# Allegro board PMOD2BNCSIMPLE_v1_05.brd
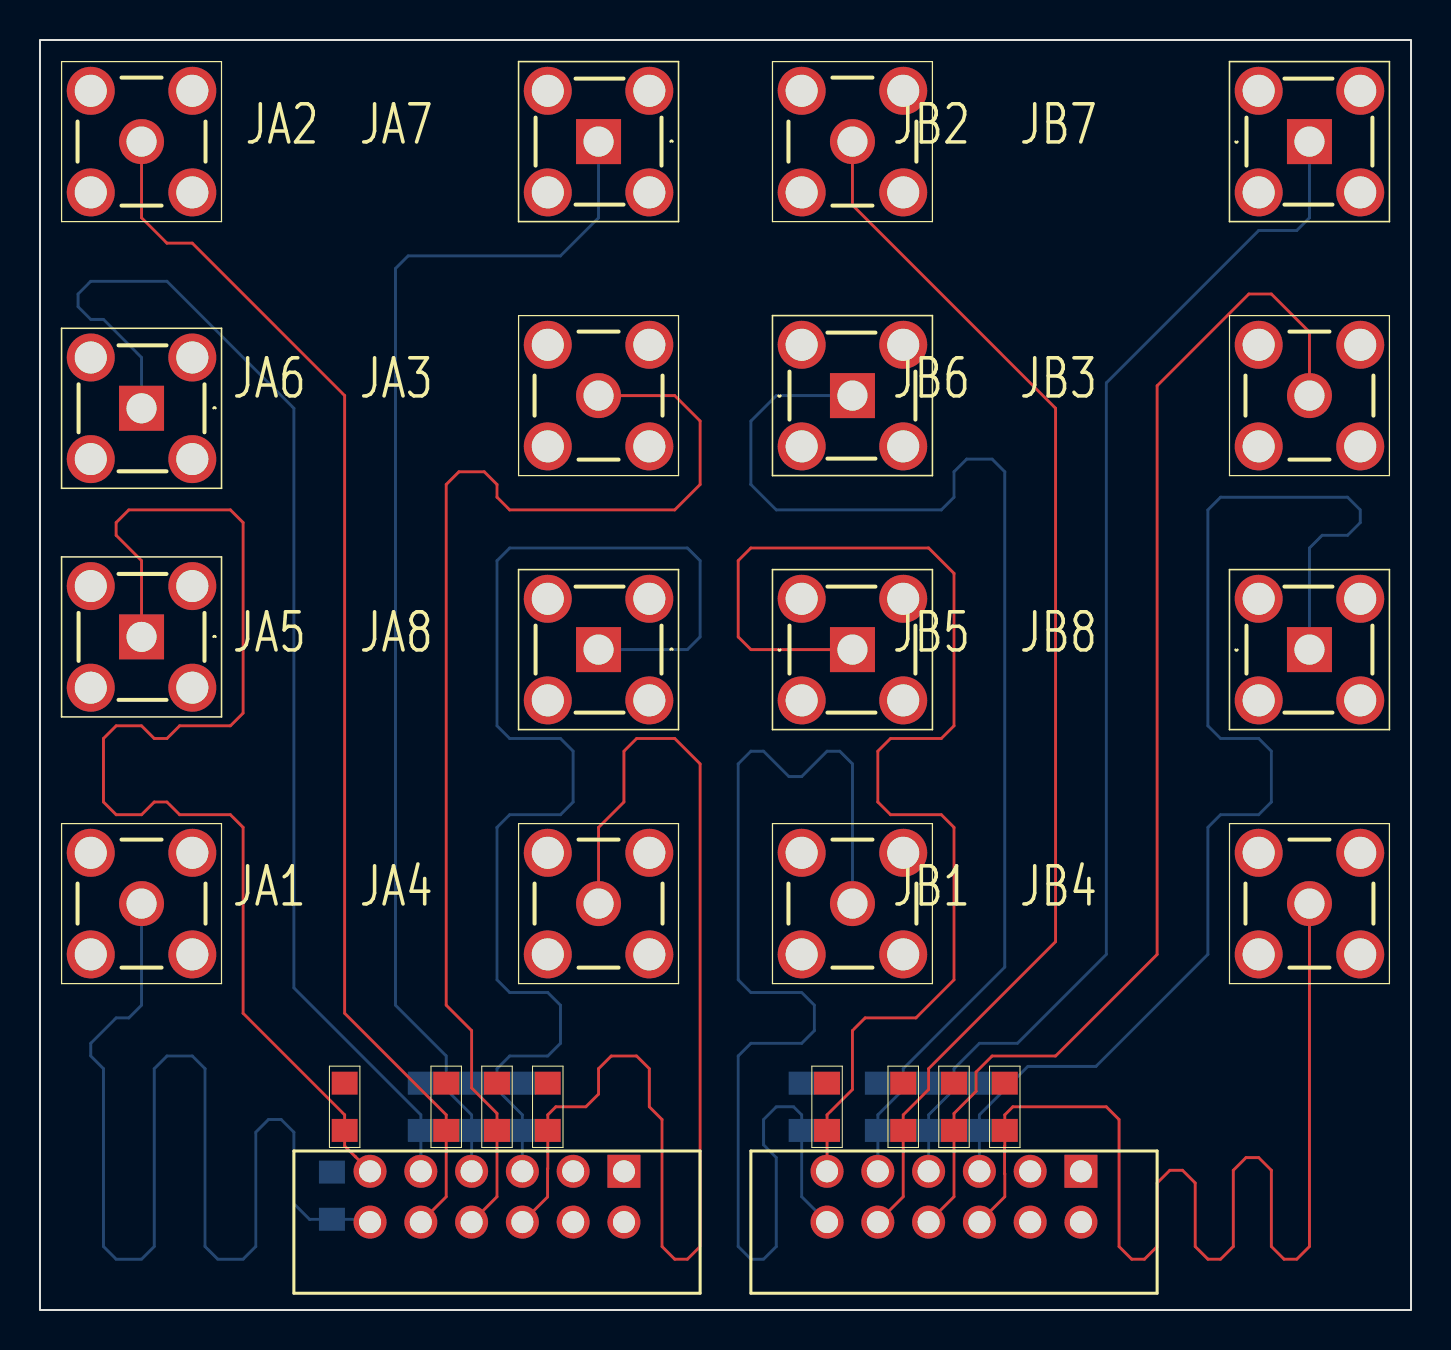
[diagram p0: board, top side]
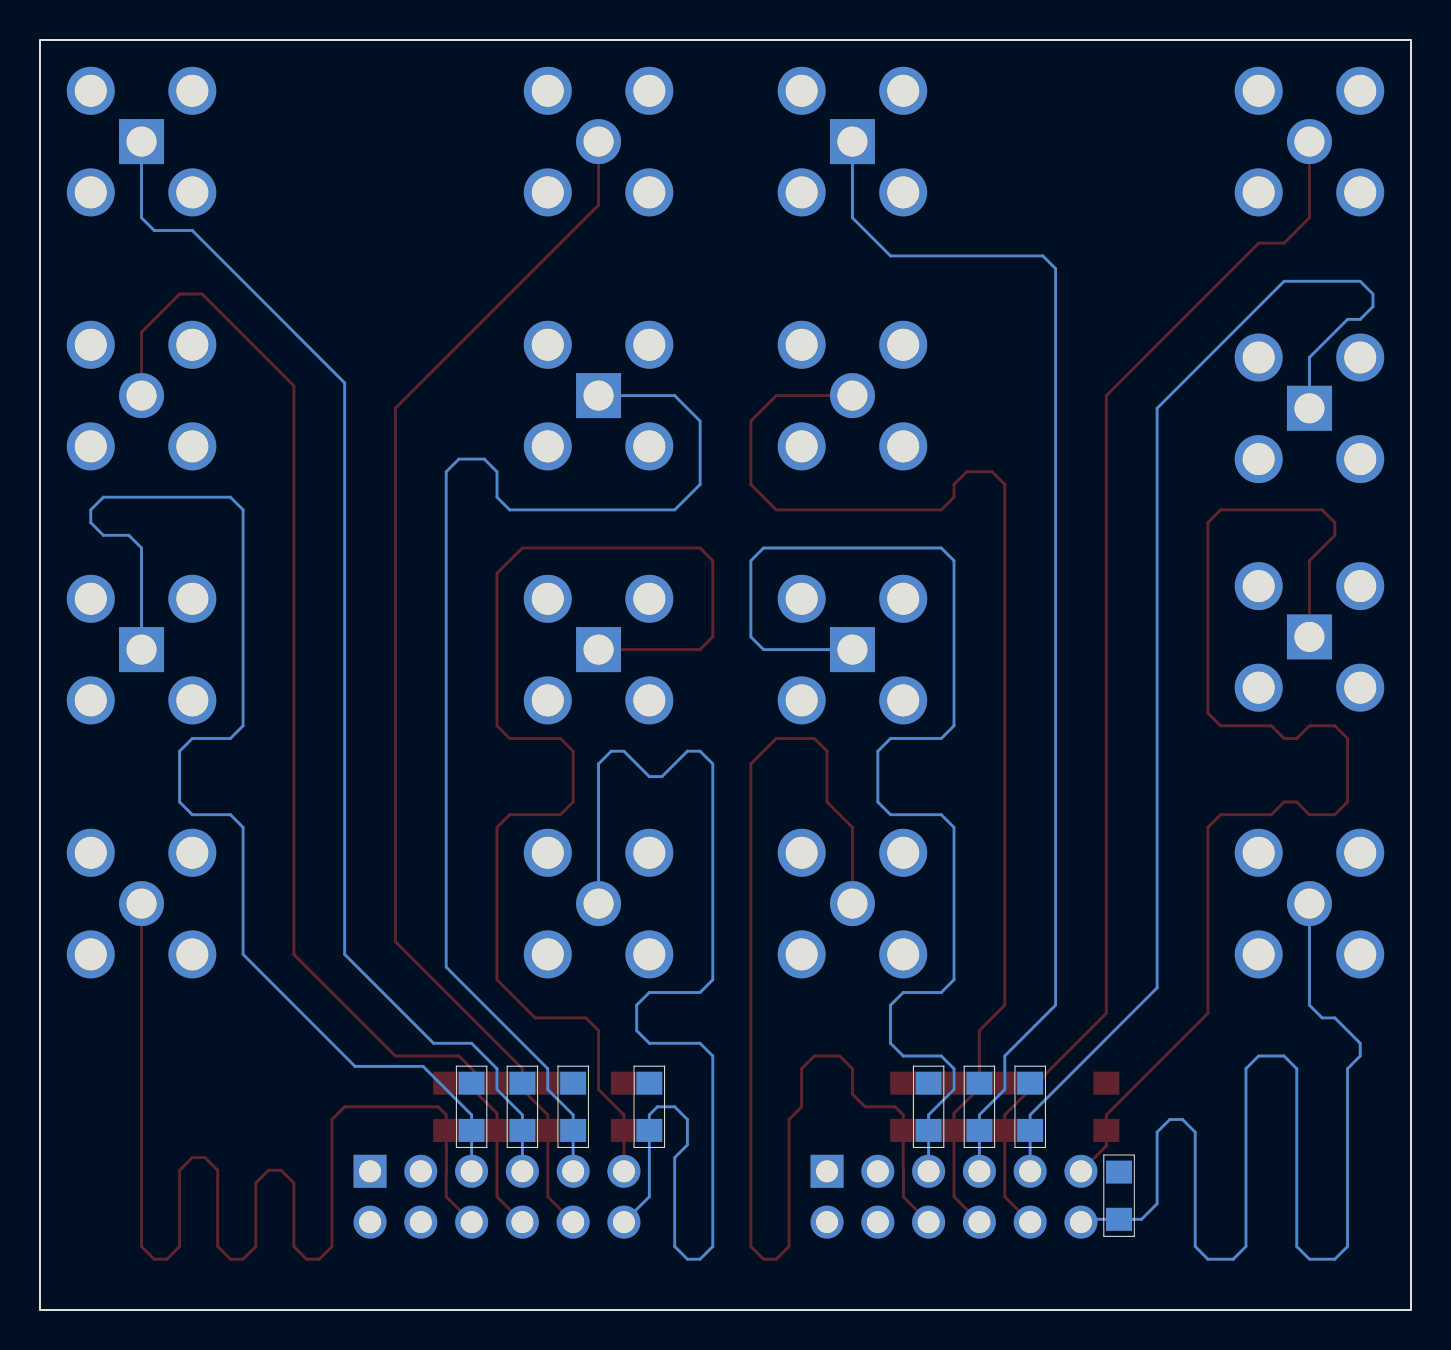
[diagram p1: board, bottom side, seen from below]

Outline 68.58 x 63.5 mm; copper layers: TOP, GND1, GND2, BOTTOM. Coordinates in mm from the lower left corner of the outline.
Outline path: rectangle 0,0 68.58,63.5

## Design rules (mm)
constraint set DEFAULT: min track width 0.145

## Placement (name value [footprint] x y rotation side)
J1  71764_0114  [717640112]  12.7 0.84 180 top
J2  71764_0114  [717640112]  35.56 0.84 180 top
R1  -  [RES_0805]  24.13 10.16 90 bottom
R2  -  [RES_0805]  21.59 10.16 90 bottom
R3  -  [RES_0805]  19.05 10.16 90 bottom
R4  -  [RES_0805]  15.24 10.16 90 top
R5  -  [RES_0805]  14.61 5.71 90 bottom
R6  -  [RES_0805]  20.32 10.16 90 top
R7  -  [RES_0805]  22.86 10.16 90 top
R8  -  [RES_0805]  25.4 10.16 90 top
R9  -  [RES_0805]  46.99 10.16 90 bottom
R10  -  [RES_0805]  44.45 10.16 90 bottom
R11  -  [RES_0805]  41.91 10.16 90 bottom
R12  -  [RES_0805]  39.37 10.16 90 top
R13  -  [RES_0805]  38.1 10.16 90 bottom
R14  -  [RES_0805]  43.18 10.16 90 top
R15  -  [RES_0805]  45.72 10.16 90 top
R16  -  [RES_0805]  48.26 10.16 90 top
U1  -  [SMA-R-RA]  5.08 33.66 180 top
U2  -  [SMAFST_PCBN]  5.08 20.32 0 top
U3  -  [SMA-R-RA]  5.08 45.09 180 top
U4  -  [SMAFST_PCBN]  5.08 58.42 0 top
U5  -  [SMA-R-RA]  27.94 58.42 180 top
U6  -  [SMAFST_PCBN]  27.94 45.72 0 top
U7  -  [SMA-R-RA]  27.94 33.02 180 top
U8  -  [SMAFST_PCBN]  27.94 20.32 0 top
U9  -  [SMA-R-RA]  40.64 33.02 0 top
U10  -  [SMAFST_PCBN]  40.64 20.32 0 top
U11  -  [SMA-R-RA]  40.64 45.72 0 top
U12  -  [SMAFST_PCBN]  40.64 58.42 0 top
U13  -  [SMA-R-RA]  63.5 58.42 0 top
U14  -  [SMAFST_PCBN]  63.5 45.72 0 top
U15  -  [SMA-R-RA]  63.5 33.02 0 top
U16  -  [SMAFST_PCBN]  63.5 20.32 0 top

## Library data of the parts
J1 J2 = 71764_0114
R1-R3 R5-R16 = RES_0805
R4 = RES_0805: signal model: resistorPack_850
U1 U3 U5 U7 U9 U11 U13 U15 = SMA-R-RA
U2 U4 U6 U8 U10 U12 U14 U16 = SMAFST_PCBN

## Footprints (pads in the part's own frame, mm; a bottom-side part is the same pattern mirrored in y, then rotated)
717640112
  rect 1.651x1.651 hole 1.1: 1(-16.51,-6.096)
  round 1.651 hole 1.1: 2(-16.51,-3.556) 3(-13.97,-6.096) 4(-13.97,-3.556) 5(-11.43,-6.096) 6(-11.43,-3.556) 7(-8.89,-6.096) 8(-8.89,-3.556) 9(-6.35,-6.096) 10(-6.35,-3.556) 11(-3.81,-6.096) 12(-3.81,-3.556)
RES_0805
  rect 1.151x1.3 smd: 1(1.181,0) 2(-1.181,0)
SMA-R-RA
  rect 2.25x2.25 hole 1.501: 1(0,0)
  round 2.4 hole 1.6: 2(-2.54,2.54) 3(-2.54,-2.54) 4(2.54,-2.54) 5(2.54,2.54)
SMAFST_PCBN
  round 2.25 hole 1.501: 1(0,0)
  round 2.4 hole 1.6: 2(-2.54,-2.54) 3(2.54,-2.54) 4(2.54,2.54) 5(-2.54,2.54)

## Nets
GND: J1.3 J1.4 J2.3 J2.4 R1.1 R2.1 R3.1 R4.1 R5.1 R6.1 R7.1 R8.1 R9.1 R10.1 R11.1 R12.1 R13.1 R14.1 R15.1 R16.1 U1.2 U1.3 U1.4 U1.5 U2.2 U2.3 U2.4 U2.5 U3.2 U3.3 U3.4 U3.5 U4.2 U4.3 U4.4 U4.5 U5.2 U5.3 U5.4 U5.5 U6.2 U6.3 U6.4 U6.5 U7.2 U7.3 U7.4 U7.5 U8.2 U8.3 U8.4 U8.5 U9.2 U9.3 U9.4 U9.5 U10.2 U10.3 U10.4 U10.5 U11.2 U11.3 U11.4 U11.5 U12.2 U12.3 U12.4 U12.5 U13.2 U13.3 U13.4 U13.5 U14.2 U14.3 U14.4 U14.5 U15.2 U15.3 U15.4 U15.5 U16.2 U16.3 U16.4 U16.5
N17882: J1.11 R4.2 U1.1
N17894: J1.9 R3.2 U3.1
N17906: J1.7 R2.2 U5.1
N17918: J1.5 R1.2 U7.1
N17930: J1.12 R5.2 U2.1
N17948: J1.10 R6.2 U4.1
N17973: J1.8 R7.2 U6.1
N17998: J1.6 R8.2 U8.1
N19655: J2.11 R12.2 U9.1
N19661: J2.9 R11.2 U11.1
N19667: J2.7 R10.2 U13.1
N19673: J2.5 R9.2 U15.1
N19679: J2.12 R13.2 U10.1
N19687: J2.10 R14.2 U12.1
N19697: J2.8 R15.2 U14.1
N19707: J2.6 R16.2 U16.1

Pads without a net: J1 1 2; J2 1 2

## Routing (per net, layer and track width the routed paths; a pad name or vN(x,y) marks a point on that pad's centre or on a via; arc(x,y) is an arc through that point)
N17882: length 61.7
  TOP w0.145: J1.11 15.78,7.66 15.78,7.66 15.24,8.2 R4.2 15.24,9.76 10.16,14.84 10.16,24.13 9.53,24.77 6.99,24.77 6.35,25.4 5.71,25.4 5.08,24.77 3.81,24.77 3.17,25.4 3.17,28.57 3.81,29.21 5.08,29.21 5.71,28.57 6.35,28.57 6.99,29.21 9.53,29.21 10.16,29.84 10.16,39.37 9.53,40.01 4.45,40.01 3.81,39.37 3.81,38.73 5.08,37.47 U1.1
N17894: length 61.9
  BOTTOM w0.145: U3.1 5.08,47.62 3.17,49.53 2.54,49.53 1.91,50.16 1.91,50.8 2.54,51.44 6.35,51.44 12.7,45.09 12.7,16.11 19.05,9.76 R3.2 J1.9
N17906: length 61.7
  BOTTOM w0.145: J1.7 R2.2 21.59,9.76 20.32,11.03 20.32,12.7 17.78,15.24 17.78,52.07 18.41,52.7 26.04,52.7 27.94,54.61 U5.1
N17918: length 61.9
  BOTTOM w0.145: J1.5 R1.2 24.13,9.76 22.86,11.03 22.86,12.06 23.5,12.7 25.4,12.7 26.04,13.34 26.04,15.24 25.4,15.88 23.5,15.88 22.86,16.51 22.86,24.13 23.5,24.77 26.04,24.77 26.67,25.4 26.67,27.94 26.04,28.57 23.5,28.57 22.86,29.21 22.86,37.47 23.5,38.1 32.38,38.1 33.02,37.47 33.02,33.66 32.38,33.02 U7.1
N17930: length 61.7
  BOTTOM w0.145: J1.12 16.37,4.53 R5.2 13.48,4.53 12.7,5.31 12.7,8.89 12.06,9.53 11.43,9.53 10.79,8.89 10.79,3.17 10.16,2.54 8.89,2.54 8.26,3.17 8.26,12.07 7.62,12.7 6.35,12.7 5.71,12.06 5.71,3.17 5.08,2.54 3.81,2.54 3.17,3.17 3.17,12.06 2.54,12.7 2.54,13.34 3.81,14.61 4.45,14.61 5.08,15.24 U2.1
N17948: length 61.6
  TOP w0.145: U4.1 5.08,54.61 6.35,53.34 7.62,53.34 15.24,45.72 15.24,14.84 20.32,9.76 R6.2 20.32,5.66 J1.10
N17973: length 61.9
  TOP w0.145: U6.1 31.75,45.72 33.02,44.45 33.02,41.27 31.75,40.01 23.5,40.01 22.86,40.64 22.86,41.27 22.23,41.91 20.95,41.91 20.32,41.27 20.32,15.24 21.59,13.97 21.59,11.1 22.86,9.83 R7.2 22.86,5.66 J1.8
N17998: length 61.7
  TOP w0.145: J1.6 25.39,5.65 25.39,7.05 25.4,7.06 R8.2 25.4,9.76 25.8,10.16 27.3,10.16 27.94,10.79 27.94,12.06 28.57,12.7 29.84,12.7 30.48,12.06 30.48,10.16 31.11,9.53 31.11,3.17 31.75,2.54 32.38,2.54 33.02,3.17 33.02,27.3 31.75,28.57 29.84,28.57 29.21,27.94 29.21,25.4 27.94,24.13 U8.1
N19655: length 61.5
  TOP w0.145: J2.11 R12.2 39.37,9.76 40.64,11.03 40.64,13.97 41.27,14.61 43.81,14.61 45.72,16.51 45.72,24.13 45.09,24.77 42.55,24.77 41.91,25.4 41.91,27.94 42.55,28.57 45.09,28.57 45.72,29.21 45.72,36.83 44.45,38.1 35.56,38.1 34.92,37.47 34.92,33.66 35.56,33.02 U9.1
N19661: length 61.7
  BOTTOM w0.145: J2.9 R11.2 41.91,9.76 43.18,11.03 43.18,12.06 48.26,17.14 48.26,41.91 47.62,42.55 46.35,42.55 45.72,41.91 45.72,40.64 45.09,40.01 36.83,40.01 35.56,41.27 35.56,41.27 35.56,44.45 36.83,45.72 U11.1
N19667: length 61.6
  BOTTOM w0.145: U13.1 63.5,54.61 62.87,53.98 60.96,53.98 53.34,46.35 53.34,17.78 48.89,13.34 46.99,13.34 45.72,12.06 45.72,11.03 44.45,9.76 R10.2 J2.7
N19673: length 61.6
  BOTTOM w0.145: U15.1 63.5,38.1 64.14,38.73 65.41,38.73 66.04,39.37 66.04,40.01 65.41,40.64 59.05,40.64 58.42,40.01 58.42,29.21 59.05,28.57 60.96,28.57 61.59,27.94 61.59,25.4 60.96,24.77 59.05,24.77 58.42,24.13 58.42,17.78 52.82,12.18 49.41,12.18 46.99,9.76 R9.2 J2.5
N19679: length 61.8
  BOTTOM w0.145: J2.12 38.1,5.66 R13.2 38.1,9.76 37.7,10.16 36.83,10.16 36.2,9.53 36.2,8.26 36.83,7.62 36.83,3.17 36.2,2.54 35.56,2.54 34.92,3.17 34.92,12.7 35.56,13.34 38.1,13.34 38.73,13.97 38.73,15.24 38.1,15.88 35.56,15.88 34.92,16.51 34.92,27.3 35.56,27.94 36.2,27.94 37.47,26.67 38.1,26.67 39.37,27.94 40.01,27.94 40.64,27.3 U10.1
N19687: length 61.9
  TOP w0.145: U12.1 40.64,55.24 50.8,45.09 50.8,18.42 44.45,12.07 44.45,11.03 43.18,9.76 R14.2 43.18,5.66 J2.10
N19697: length 61.9
  TOP w0.145: U14.1 63.5,48.9 61.59,50.8 60.47,50.8 55.88,46.21 55.88,17.78 50.8,12.7 47.62,12.7 46.82,11.9 46.82,10.93 45.72,9.83 R15.2 45.72,5.66 J2.8
N19707: length 61.7
  TOP w0.145: J2.6 48.26,5.66 48.26,6.81 48.25,6.82 48.25,8.19 48.26,8.2 R16.2 48.26,9.76 48.66,10.16 53.34,10.16 53.98,9.53 53.98,3.17 54.61,2.54 55.25,2.54 55.88,3.17 55.88,6.35 56.52,6.99 57.15,6.99 57.78,6.35 57.78,3.17 58.42,2.54 59.05,2.54 59.69,3.17 59.69,6.99 60.33,7.62 60.96,7.62 61.59,6.99 61.59,3.17 62.23,2.54 62.87,2.54 63.5,3.17 U16.1

## Text on the board
Ref Des/Silkscreen Top: JA6 | JA5 | JA1 | JA2 | JA7 | JA3 | JA8 | JA4 | JB2 | JB6 | JB5 | JB1 | JB7 | JB3 | JB8 | JB4
